# Altium PCB PCB1_Bhavik.PcbDoc
Units mm, origin at the board's own origin, x right, y up, seen from the top; angles counter-clockwise.
Board outline 50 x 50 mm, 2 copper layers (Top Layer, Bottom Layer); 221 components, 144 nets, 620 pads, 0 vias.
Unrouted connection lines stored in the file: 399.
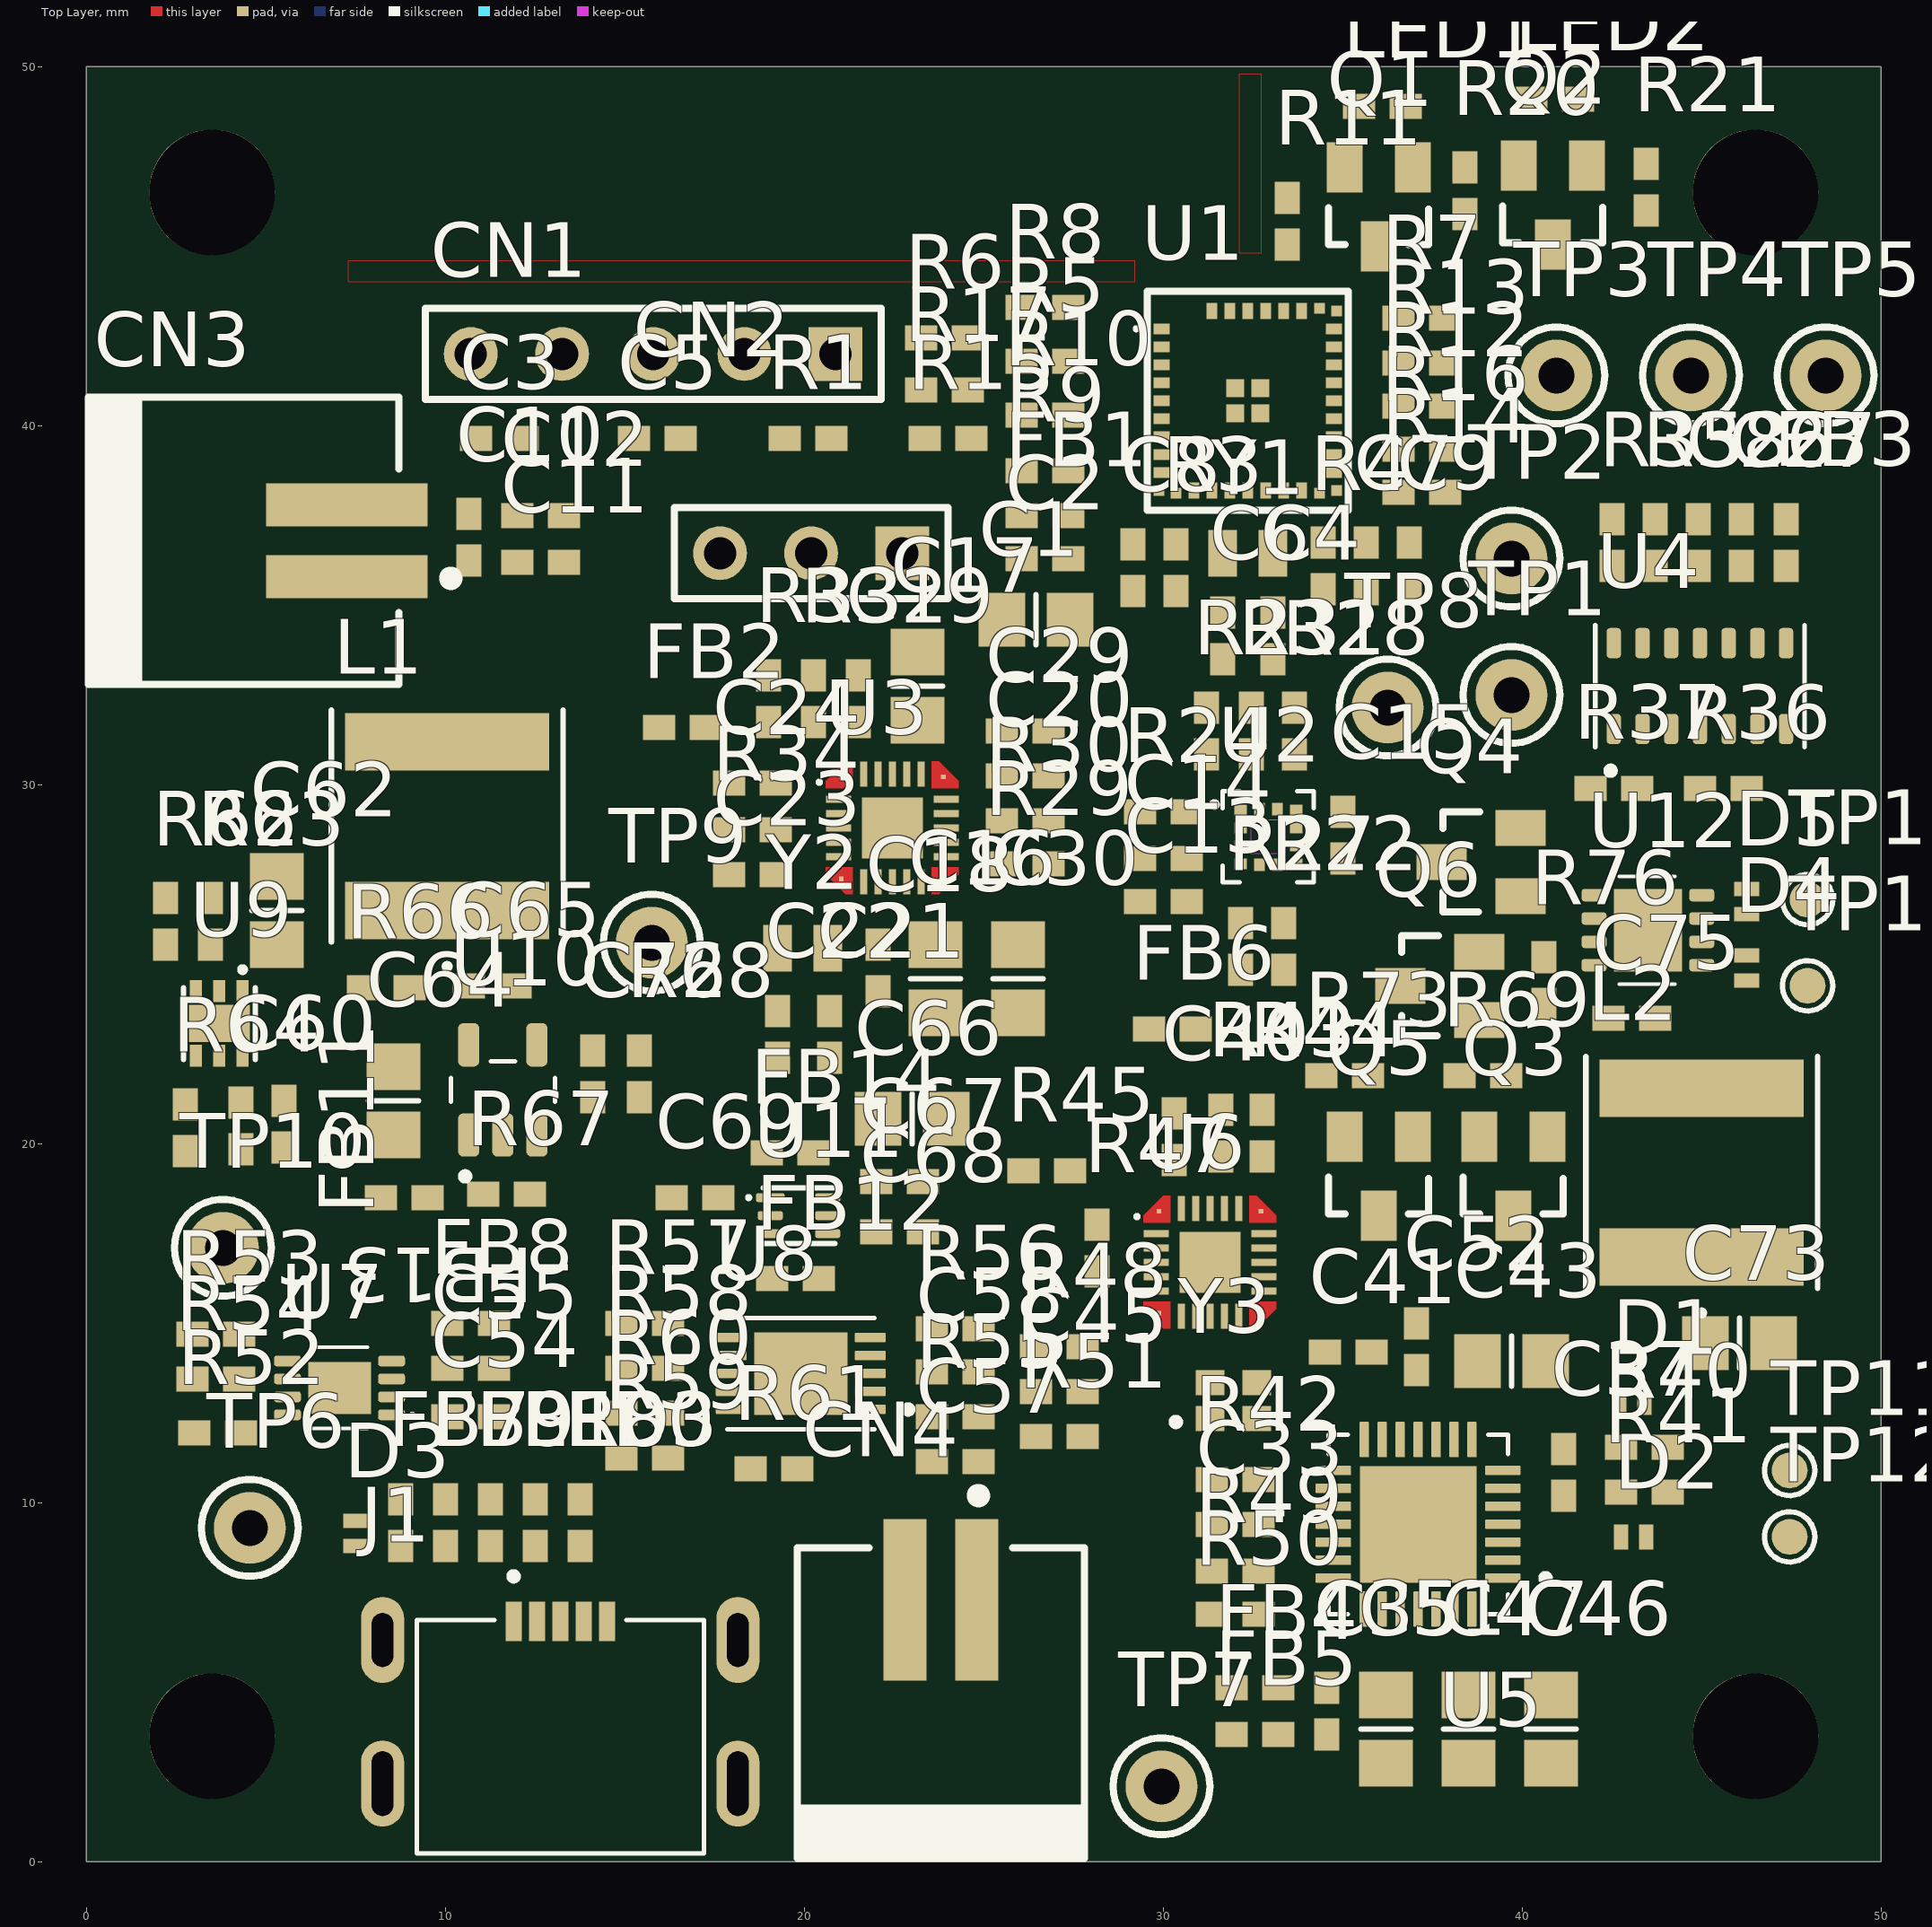
[diagram p0: Top Layer view]
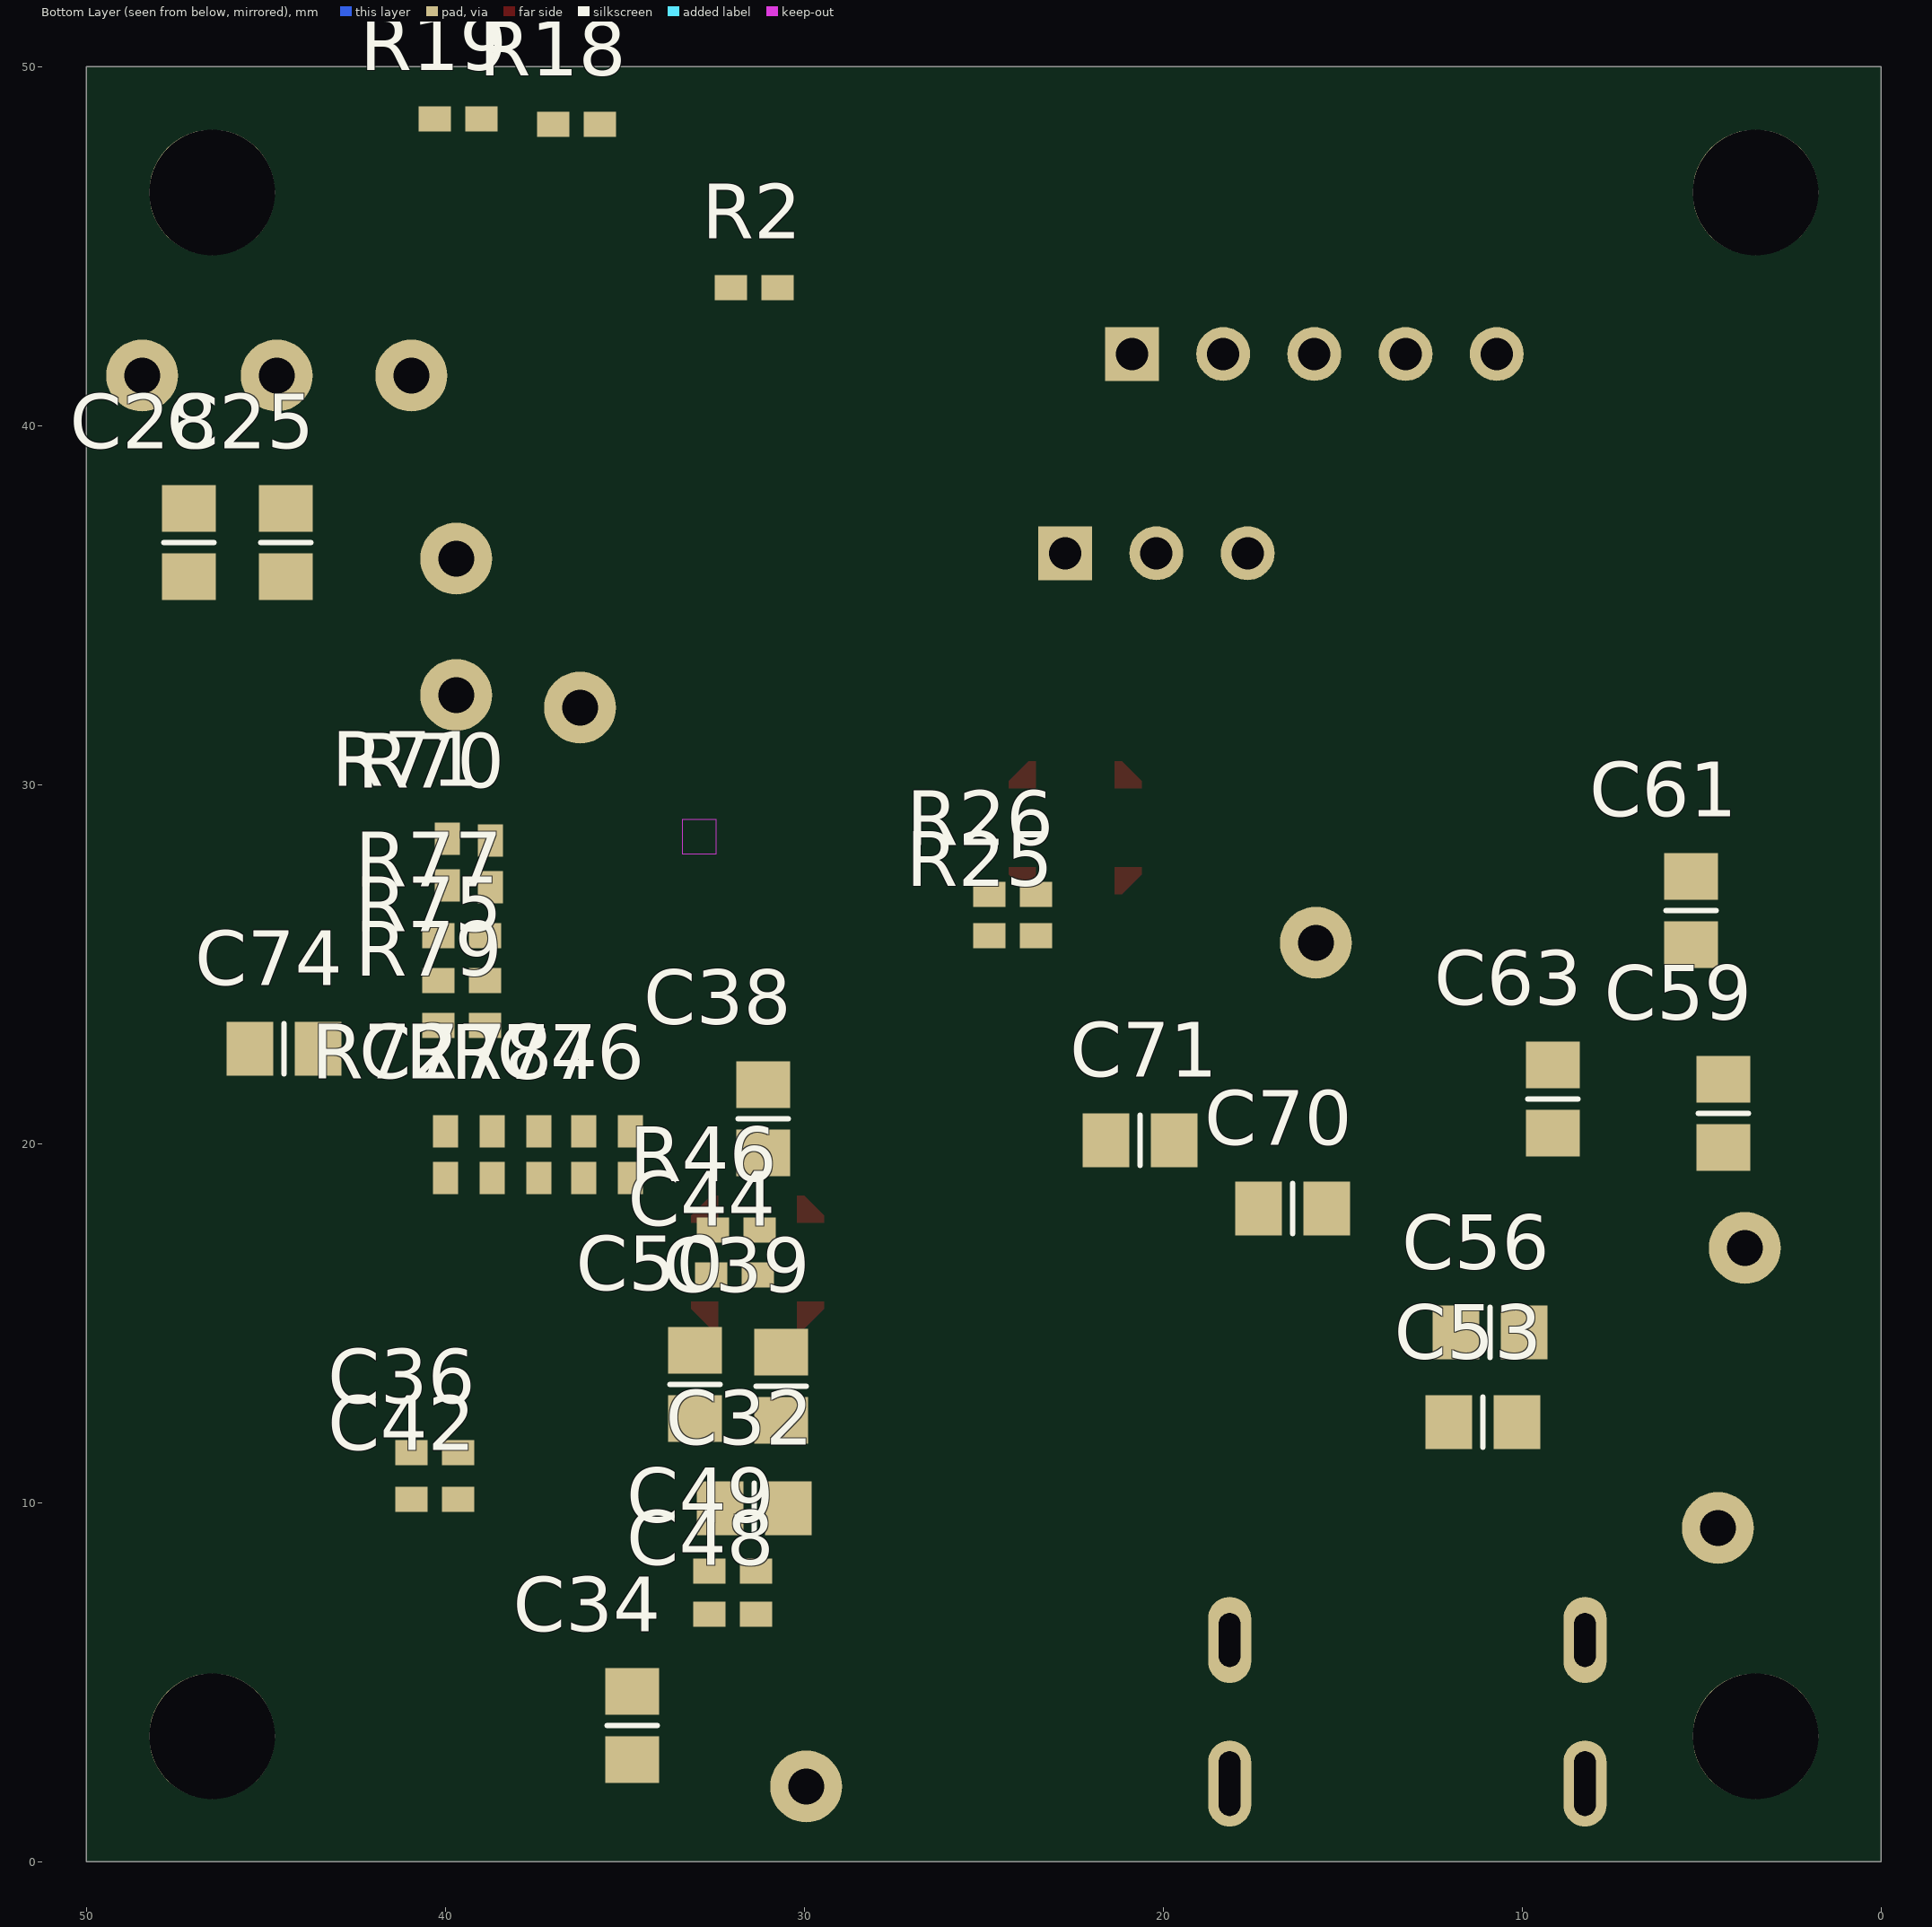
[diagram p1: Bottom Layer view, seen from below]

## Layer stack, top to bottom
Top Solder: solder mask 0.0102, Solder Resist, Dk 3.5
Top Layer: signal copper 0.0356
Dielectric 1: dielectric 0.32, FR-4, Dk 4.8
Bottom Layer: signal copper 0.0356
Bottom Solder: solder mask 0.0102, Solder Resist, Dk 3.5

## Board outline
0,0 50,0 50,50 0,50

## Design rules (kind name [scope] priority, off if disabled: settings)
Clearance [All] p1: gap=0.2 ignorepadtopadclearanceinfootprint=FALSE
PolygonConnect [All] p1: connectstyle=Relief reliefconductorwidth=0.254 reliefentries=4 polygonreliefangle="90 Angle" airgapwidth=0.254
RoutingVias [All] p1: holewidth=0.711 width=1.27 viastyle="Through Hole" minholewidth=0.711 minwidth=1.27 maxholewidth=0.711 maxwidth=1.27
SolderMaskExpansion [All] p1: expansion=0.102 istentingtop=FALSE
Width [All] p1: maxlimit=0.254 minlimit=0.254 preferedwidth=0.254
30 further rules are at their usual default settings.

## Components (designator, comment, footprint, x,y, rotation, side; value= is the part's Value field where it differs from the comment)
C1 "10uF" 0805C 26.45,34.6 r0 top
C2 "0.1uF" 0402C 26.7,36.3 r0 top
C3 "0.1uF" 0402C 11.5,39.65 r0 top
C4 "DNP" 0402C 33.05,34.15 r270 top
C5 "0.1uF" 0402C 15.9,39.65 r0 top
C6 "DNP" 0402C 31.65,34.15 r270 top
C7 "0.1uF" 0402C 35.65,36.1 r90 top
C8 "0.1uF" 0402C 29.15,36.05 r90 top
C9 "0.1uF" 0402C 36.85,36.1 r90 top
C10 "DNP" 0402C 10.65,36.9 r90 top
C11 "DNP" 0402C 12.65,36.2 r180 top
C12 "DNP" 0402C 12.65,37.5 r180 top
C13 "0.1uF" 0402C 30,26.75 r0 top
C14 "0.1uF" 0402C 30,27.95 r0 top
C15 "0.1uF" 0402C 35,28.6 r270 top
C16 "10uF" 0805C 23.65,24.6 r90 top
C17 "1uF" 0805C 23.15,32.75 r270 top
C18 "0.1uF" 0402C 22.05,24.9 r90 top
C19 "0.1uF" 0402C 21.5,32.4 r270 top
C20 "0.1uF" 0402C 26.15,30.25 r180 top
C21 "DNP" 0402C 20.7,23.05 r90 top
C22 "DNP" 0402C 19.25,23.05 r90 top
C23 "0.1uF" 0402C 18.55,27.5 r0 top
C24 "0.1uF" 0402C 18.55,30.05 r0 top
C25 "4.7uF" 0805C 44.45,36.75 r270 bottom
C26 "0.1uF" 0402C 44.9,36.75 r270 top
C27 "0.1uF" 0402C 46.1,36.75 r270 top
C28 "10uF" 0805C 47.15,36.75 r270 bottom
C29 "0.1uF" 0402C 26.15,31.5 r180 top
C30 "1uF" 0805C 25.95,24.6 r90 top
C31 "0.1uF" 0402C 351.417,-10.913 r90 top
C32 "10uF" 0805C 31.4,9.85 r0 bottom
C33 "0.1uF" 0402C 32,9.4 r0 top
C34 "10uF" 0805C 34.8,3.8 r90 bottom
C35 "0.1uF" 0402C 34.55,4.2 r90 top
C36 "10pF" 0402C 40.3,11.4 r180 bottom
C37 "1nF" 0402C 41.15,10.85 r90 top
C38 "10uF" 0805C 31.15,20.7 r270 bottom
C39 "1uF" 0805C 30.65,13.25 r90 bottom
C40 "0.1uF" 0402C 30.3,20.2 r270 top
C41 "0.1uF" 0402C 35.15,14.2 r180 top
C42 "10pF" 0402C 40.3,10.1 r180 bottom
C43 "1uF" 0805C 39.7,13.95 r0 top
C44 "1nF" 0402C 31.95,16.35 r0 bottom
C45 "0.1uF" 0402C 27.1,13.1 r0 top
C46 "1uF" 0805C 40.8,3.7 r90 top
C47 "10uF" 0805C 38.5,3.7 r90 top
C48 "100pF" 0402C 32,6.9 r180 bottom
C49 "100pF" 0402C 32,8.1 r180 bottom
C50 "1uF" 0805C 33.05,13.3 r90 bottom
C51 "10uF" 0805C 36.2,3.7 r90 top
C52 "1nF" 0402C 37.05,14.35 r270 top
C53 "4.7uF" 0805C 11.1,12.25 r180 bottom
C54 "0.1uF" 0402C 10.7,12.4 r180 top
C55 "0.1uF" 0402C 10.7,13.75 r180 top
C56 "4.7uF" 0805C 10.9,14.75 r180 bottom
C57 "0.1uF" 0402C 24.2,11.15 r0 top
C58 "0.1uF" 0402C 24.2,13.65 r180 top
C59 "1uF" 0805C 4.4,20.85 r90 bottom
C60 "0.1uF" 0402C 4.3,20.5 r90 top
C61 "1uF" 0805C 5.3,26.5 r270 bottom
C62 "4.7uF" 0805C 5.3,26.5 r270 top
C63 "4.7uF" 0805C 9.15,21.25 r270 bottom
C64 "1uF" 0805C 8.55,21.2 r270 top
C65 "DNP" 0402C 11.3,24.4 r0 top
C66 "4.7uF" 0805C 23,20.7 r180 top
C67 "0.1uF" 0402C 22.65,18.95 r180 top
C68 "0.1uF" 0402C 22.65,17.55 r180 top
C69 "0.1uF" 0402C 16.95,18.5 r0 top
C70 "4.7uF" 0805C 16.4,18.2 r0 bottom
C71 "4.7uF" 0805C 20.65,20.1 r180 bottom
C72 "22pF" 0402C 14.1,21.95 r90 top
C73 "10uF" 0805C 46.05,14.45 r180 top
C74 "10uF" 0805C 44.5,22.65 r0 bottom
C75 "0.1uF" 0402C 43.05,23.5 r180 top
C76 "0.1uF" 0402C 34.85,19.7 r270 bottom
C77 "0.1uF" 0402C 38.7,19.7 r270 bottom
CN1 "Header 5" HDR1X5 15.79,42 r180 top
CN2 "Header 3" HDR1X3 20.19,36.45 r180 top
CN3 "CON_2P_140-502-417-060" 140-502-417-060 7.25,36.8 r270 top
CN4 "CON_2P_140-502-417-060" 140-502-417-060 23.8,7.3 r0 top
D1 "D5V0P1B2LP-7B" D5V0P1B2LP-7B 43.05,12.8 r180 top
D2 "D5V0P1B2LP-7B" D5V0P1B2LP-7B 43.1,9.05 r180 top
D3 "D5V0P1B2LP-7B" D5V0P1B2LP-7B 7.5,9.15 r90 top
D4 "D5V0P1B2LP-7B" D5V0P1B2LP-7B 46.25,24.9 r270 top
D5 "D5V0P1B2LP-7B" D5V0P1B2LP-7B 46.25,26.75 r270 top
FB1 "Ferrite Bead" 0402R 26.7,37.5 r180 top
FB2 "Ferrite Bead" 0402R 16.6,31.6 r0 top
FB3 "Ferrite Bead" 0402R 47.35,36.75 r90 top
FB4 "Ferrite Bead" 0402R 32.55,4.85 r180 top
FB5 "Ferrite Bead" 0402R 32.55,3.55 r0 top
FB6 "Ferrite Bead" 0402R 30.25,23.2 r180 top
FB7 "Ferrite Bead" 0402R 8.75,9.45 r90 top
FB8 "Ferrite Bead" 0402R 10.7,15 r0 top
FB9 "Ferrite Bead" 0402R 10,9.45 r90 top
FB10 "Ferrite Bead" 0402R 11.25,9.45 r90 top
FB11 "Ferrite Bead" 0402R 5.5,20.55 r90 top
FB12 "Ferrite Bead" 0402R 19.75,16.25 r180 top
FB13 "Ferrite Bead" 0402R 8.85,18.5 r180 top
FB14 "Ferrite Bead" 0402R 19.6,19.75 r0 top
J1 "0476420001" MOLEX_476420001 13.2,6.7 r0 top
L1 "470uH" NR6028T3R0N 10.05,28.85 r90 top
L2 "10uH" NR6028T3R0N 45,19.2 r90 top
LED1 "5988A10107F" 0402R 36.1,48.9 r0 top value=Red
LED2 "5988A10107F" 0402R 40.9,49.1 r0 top value=Red
LED3 "LED_Green" 0402R 12.5,9.45 r90 top value=Green
Q1 "FDV301N" SOT_23 36,46.1 r180 top
Q2 "FDV301N" SOT_23 40.85,46.15 r180 top
Q3 "FDV301N" SOT_23 39.75,19.1 r180 top
Q4 "FDV301N" SOT_23 38.85,27.85 r90 top
Q5 "FDV301N" SOT_23 36,19.1 r180 top
Q6 "FDV301N" SOT_23 37.7,24.4 r90 top
R1 "1K" 0402R 20.1,39.65 r0 top
R2 "0E" 0402R 31.4,43.85 r180 bottom
R3 "4.7k" 0402R 30.35,36.05 r270 top
R4 "4.7k" 0402R 34.45,36.1 r270 top
R5 "0E" 0402R 26.7,41.8 r180 top
R6 "0E" 0402R 23.9,42.45 r180 top
R7 "0E" 0402R 37.2,43 r0 top
R8 "0E" 0402R 26.7,43.3 r180 top
R9 "4.7k" 0402R 26.7,38.75 r180 top
R10 "4.7k" 0402R 26.7,40.3 r180 top
R11 "0E" 0402R 33.45,45.7 r90 top
R12 "0E" 0402R 37.2,40.55 r180 top
R13 "0E" 0402R 37.2,41.75 r0 top
R14 "0E" 0402R 37.2,38.15 r0 top
R15 "0E" 0402R 24,39.65 r0 top
R16 "0E" 0402R 37.2,39.35 r0 top
R17 "0E" 0402R 23.9,41 r0 top
R18 "100E" 0402R 36.35,48.4 r180 bottom
R19 "100E" 0402R 39.65,48.55 r0 bottom
R20 "1K" 0402R 38.4,46.55 r90 top
R21 "1K" 0402R 43.45,46.65 r90 top
R22 "0E" 0402R 33.35,25.5 r270 top
R23 "DNP" 0402C 31.2,31.5 r90 top
R24 "DNP" 0402C 30,29.25 r180 top
R25 "1.2K" 0402R 24.2,25.8 r0 bottom
R26 "1.2K" 0402R 24.2,26.95 r0 bottom
R27 "0E" 0402R 32.15,25.5 r270 top
R28 "DNP" 0402C 33.65,31.5 r90 top
R29 "0E" 0402R 26.15,27.8 r0 top
R30 "0E" 0402R 26.15,29 r0 top
R31 "0E" 0402R 32.45,31.5 r270 top
R32 "0E" 0402R 20.25,32.4 r270 top
R33 "0E" 0402R 19,32.4 r270 top
R34 "10E" 0402R 18.55,28.75 r180 top
R35 "1.2K" 0402R 42.5,36.75 r270 top
R36 "0E" 0402R 45.6,29.9 r180 top
R37 "0E" 0402R 42.55,29.9 r0 top
R38 "0E" 0402R 43.7,36.75 r270 top
R39 "0E" 0402R 345.575,-10.913 r90 top
R40 "49.9k" 0402R 43.4,11.55 r0 top
R41 "49.9k" 0402R 43.4,10.3 r0 top
R42 "0E" 0402R 32,10.65 r0 top
R43 "0E" 0402R 31.6,20.3 r90 top
R44 "0E" 0402R 32.75,20.3 r90 top
R45 "0E" 0402R 26.75,19.25 r0 top
R46 "100E" 0402R 31.9,17.6 r180 bottom
R47 "0E" 0402R 28.15,17.1 r90 top
R48 "0E" 0402R 27.1,14.35 r0 top
R49 "100E" 0402R 32,8.1 r0 top
R50 "100E" 0402R 32,6.9 r0 top
R51 "10E" 0402R 27.1,11.85 r180 top
R52 "49.9k" 0402R 3.65,11.95 r0 top
R53 "49.9k" 0402R 3.6,14.7 r0 top
R54 "0E" 0402R 3.6,13.45 r0 top
R55 "1K" 0402R 24.2,12.4 r0 top
R56 "470E" 0402R 24.2,14.85 r0 top
R57 "0E" 0402R 15.55,15 r180 top
R58 "0E" 0402R 15.55,13.75 r180 top
R59 "0E" 0402R 15.55,11.25 r180 top
R60 "0E" 0402R 15.55,12.5 r180 top
R61 "1E" 0402R 19.15,10.95 r180 top
R62 "560k" 0402R 2.2,26.2 r90 top
R63 "100k" 0402R 3.45,26.2 r270 top
R64 "49.9k" 0402R 2.75,20.45 r90 top
R65 "0E" 0402R 54.05,3.5 r90 top
R66 "560k" 0402R 8.35,24.35 r0 top
R67 "0E" 0402R 11.7,18.6 r180 top
R68 "180k" 0402R 15.4,21.95 r90 top
R69 "4.7k" 0402R 38.9,21.9 r0 top
R70 "10k" 0402R 38.75,27.8 r270 bottom
R71 "10k" 0402R 39.95,27.85 r90 bottom
R72 "1K" 0402R 40,19.7 r270 bottom
R73 "4.7k" 0402R 35.05,21.9 r0 top
R74 "1K" 0402R 36.15,19.7 r270 bottom
R75 "10k" 0402R 39.55,24.55 r180 bottom
R76 "10k" 0402R 40.6,24.55 r270 top
R77 "100k" 0402R 39.55,25.8 r0 bottom
R78 "100k" 0402R 37.4,19.7 r270 bottom
R79 "0E" 0402R 39.55,23.3 r0 bottom
R80 "3k" 0402R 13.75,9.45 r90 top
TP1 "Test_Point" TP 39.7,32.5 r90 top
TP2 "Test_Point" TP 39.7,36.3 r90 top
TP3 "Test_Point" TP 40.95,41.4 r90 top
TP4 "Test_Point" TP 44.7,41.4 r90 top
TP5 "Test_Point" TP 48.45,41.4 r90 top
TP6 "Test_Point" TP 4.55,9.3 r0 top
TP7 "Test_Point" TP 29.95,2.1 r0 top
TP8 "Test_Point" TP 36.25,32.15 r0 top
TP9 "Test_Point" TP 15.75,25.6 r0 top
TP10 "Test_Point" TP 3.8,17.1 r90 top
TP11 "Test_Point" TP_SMD 47.45,10.9 r90 top
TP12 "Test_Point" TP_SMD 47.45,9.05 r90 top
TP13 "Test_Point" TP_SMD 47.95,24.4 r90 top
TP14 "Test_Point" TP_SMD 47.95,26.8 r90 top
U1 "HJ-380IMH" HJ-380IMH 32.35,40.7 r270 top
U2 "BMA400" BMA400 32.925,28.55 r0 top
U3 "MAX32664GTGD+T" MAX32664GTGA+T 22.45,28.8 r0 top
U4 "MAX30102EFD+T" MAX30101EFD+T 44.95,32.75 r90 top value="14 OESIP"
U5 "MAX30003CTI+" MAX30003CTI+ 37.1,9.4 r180 top
U6 "MAX32663AGTGFS+" MAX32663AGTGFS+ 31.3,16.7 r0 top
U7 "Battery Charger_MCP73832" MCP73832-3ACI/MC 7.05,13.2 r180 top
U8 "DS2782G+" DS2782G+ 19.9,13.6 r180 top
U9 "ADP123ACPZ-R7" ADP123ACPZ-R7 3.7,23.35 r270 top
U10 "LM3670MFX-ADJ/NOPB" LM3670MFX-ADJ/NOPB 11.6,21.5 r90 top
U11 "TPS7A1018PDSET" TPS7A1018PDSET 19.85,18 r0 top
U12 "BMD101" BMD101 43.5,25.95 r180 top
Y1 "ECS-.327-6-12R-TR" ECS-.327-6-12R-TR 32.35,36.45 r0 top value=32.768kHz
Y2 "ECS-.327-6-12R-TR" ECS-.327-6-12R-TR 19.95,25.45 r0 top value=32.768kHz
Y3 "ECS-327MVATX-1-CN-TR" ECS-327MVATX-1-CN-TR 31.95,12.85 r0 top

## Footprints (in the part's own frame and the unit in brackets; to place one, negate y for a bottom-side part, rotate by r counter-clockwise, add the part's x,y. Pads: shape width x height; smd on the part's side, far side on the other; paste and mask are expansions set on the pad)
140-502-417-060 [mm]
  rect 1.2x4.5 smd: 1(1,0) 2(-1,0)
  silkscreen extent -4,-7.2 4,2.98, body extent -4,-7.2 4,1.45, height 5.63
0402C [mm]
  rect 0.9x0.7 smd: 1(-0.65,0) 2(0.65,0)
  body extent -0.56,-0.28 0.56,0.28, height 0.41
0402R [mm]
  rect 0.9x0.7 smd: 1(-0.65,0) 2(0.65,0)
  body extent -0.56,-0.28 0.56,0.28, height 0.41
0805C [mm]
  rect 1.3x1.5 smd: 1(-0.95,0) 2(0.95,0)
  silkscreen extent 0,-0.7 0,0.7
ADP123ACPZ-R7 [mm]
  rect 0.606x0.331 smd paste+0 mask+0.03: 1(-0.9,0.65) 2(-0.9,0) 3(-0.9,-0.65) 4(0.9,-0.65) 5(0.9,0) 6(0.9,0.65)
  rect 1.041x1.702 smd paste+0 mask+0.03: 7(0,0)
  silkscreen extent -1.55,-1 1,1, body extent -1,-0.98 1.01,0.98, height 0.6
BMA400 [mm]
  rect 0.35x0.3 smd paste+0 mask+0.05: 1(-0.775,0.75) 2(-0.775,0.25) 3(-0.775,-0.25) 4(-0.775,-0.75) 7(0.775,-0.75) 8(0.775,-0.25) 9(0.775,0.25) 10(0.775,0.75)
  rect 0.3x0.35 smd paste+0 mask+0.05: 5(-0.25,-0.775) 6(0.25,-0.775) 11(0.25,0.775) 12(-0.25,0.775)
  Keep-Out Layer region: 0.475,-0.475 -0.475,-0.475 -0.475,0.475 0.475,0.475
  Keep-Out Layer region: 0.475,-0.475 -0.475,-0.475 -0.475,0.475 0.475,0.475
  silkscreen extent -1.57,-1.27 1.27,1.27, body extent -0.99,-1.01 1.01,0.99, height 1
BMD101 [mm]
  rrect50% 0.7x0.35 smd paste+0 mask+0.05: 1(-1.5,0.975) 2(-1.5,0.325) 3(-1.5,-0.325) 4(-1.5,-0.975) 5(1.5,-0.975) 6(1.5,-0.325) 7(1.5,0.325) 8(1.5,0.975)
  rect 1.9x2.3 smd paste+0 mask+0.05: 9(0,0)
  silkscreen extent -2.08,-1.5 0.8,1.5
D5V0P1B2LP-7B [mm]
  rect 0.4x0.7 smd: 1(-0.35,0) 2(0.35,0)
DS2782G+ [mm]
  rrect25% 0.86x0.27 smd: 1(-1.935,1) 2(-1.935,0.5) 3(-1.935,0) 4(-1.935,-0.5) 5(-1.935,-1) 6(1.935,-1) 7(1.935,-0.5) 8(1.935,0) 9(1.935,0.5) 10(1.935,1)
  rect 2.6x2.3 smd paste-2: 11(0,0)
  silkscreen extent -3.1,-1.55 2.05,1.55, body extent -2,-1.5 2,1.5, height 0.8
ECS-327MVATX-1-CN-TR [mm]
  rect 0.8x0.7 smd: 1(-0.65,-0.5) 2(0.65,-0.5) 3(0.65,0.5) 4(-0.65,0.5)
  silkscreen extent -1.7,-0.7 -1.5,-0.5, body extent -1.06,-0.85 1.06,0.85, height 0.89
ECS-.327-6-12R-TR [mm]
  rect 0.8x1.3 smd: 1(-0.7,0) 2(0.7,0)
HDR1X3 [mm] "Connector; Header; 5 Position"
  rect 1.5x1.5 hole 0.9: 1(-2.54,0)
  round 1.5 hole 0.9: 2(0,0) 3(2.54,0)
  silkscreen extent -3.81,-1.27 3.81,1.27
HDR1X5 [mm] "Connector; Header; 5 Position"
  rect 1.5x1.5 hole 0.9: 1(-5.08,0)
  round 1.5 hole 0.9: 2(-2.54,0) 3(0,0) 4(2.54,0) 5(5.08,0)
  silkscreen extent -6.35,-1.27 6.35,1.27
HJ-380IMH [mm]
  rect 0.3x0.45 smd paste+0 mask+0.05: 1(-2,-2.4) 2(-1.5,-2.4) 3(-1,-2.4) 4(-0.5,-2.4) 5(0,-2.4) 6(0.5,-2.4) 7(1,-2.4) 8(1.5,-2.4) 9(2,-2.4) 21(2,2.4) 22(1.5,2.4) 23(1,2.4) 24(0.5,2.4) 25(0,2.4) 26(-0.5,2.4) 27(-1,2.4) 28(-1.5,2.4) 29(-2,2.4)
  rect 0.3x0.3 smd paste+0 mask+0.05: 10(2.5,-2.475) 11(2.575,-2) 19(2.575,2) 20(2.5,2.475) 30(-2.5,2.475) 31(-2.575,2)
  rect 0.45x0.3 smd paste+0 mask+0.05: 12(2.5,-1.5) 13(2.5,-1) 14(2.5,-0.5) 15(2.5,0) 16(2.5,0.5) 17(2.5,1) 18(2.5,1.5) 32(-2.5,1.5) 33(-2.5,1) 34(-2.5,0.5) 35(-2.5,0) 36(-2.5,-0.5) 37(-2.5,-1)
  rect 0.5x0.5 smd paste+0 mask+0.05: 38(-0.35,0.35) 38(-0.35,-0.35) 38(0.35,0.35) 38(0.35,-0.35)
  silkscreen extent -3.05,-3.15 3.05,2.8
LM3670MFX-ADJ/NOPB [mm]
  rrect50% 1.21x0.59 smd: 1(-1.255,0.95) 2(-1.255,0) 3(-1.255,-0.95) 4(1.255,-0.95) 5(1.255,0.95)
  silkscreen extent -2.51,-1.45 0.8,1.45, body extent -1.4,-1.45 1.4,1.45, height 1.45
MAX30003CTI+ [mm]
  rrect25% 0.99x0.27 smd: 1(-2.36,1.5) 2(-2.36,1) 3(-2.36,0.5) 4(-2.36,0) 5(-2.36,-0.5) 6(-2.36,-1) 7(-2.36,-1.5) 15(2.36,-1.5) 16(2.36,-1) 17(2.36,-0.5) 18(2.36,0) 19(2.36,0.5) 20(2.36,1) 21(2.36,1.5)
  rrect25% 0.27x0.99 smd: 8(-1.5,-2.36) 9(-1,-2.36) 10(-0.5,-2.36) 11(0,-2.36) 12(0.5,-2.36) 13(1,-2.36) 14(1.5,-2.36) 22(1.5,2.36) 23(1,2.36) 24(0.5,2.36) 25(0,2.36) 26(-0.5,2.36) 27(-1,2.36) 28(-1.5,2.36)
  rect 3.25x3.25 smd paste-3: 29(0,0)
  silkscreen extent -3.65,-2.5 2.5,2.5, body extent -2.5,-2.5 2.5,2.5, height 0.8
MAX30101EFD+T [mm]
  rrect50% 0.84x0.4 smd: 1(-1.195,2.4) 2(-1.195,1.6) 3(-1.195,0.8) 4(-1.195,0) 5(-1.195,-0.8) 6(-1.195,-1.6) 7(-1.195,-2.4) 8(1.195,-2.4) 9(1.195,-1.6) 10(1.195,-0.8) 11(1.195,0) 12(1.195,0.8) 13(1.195,1.6) 14(1.195,2.4)
  silkscreen extent -2.46,-2.91 1.7,2.91, body extent -1.65,-2.8 1.65,2.8, height 1.65
MAX32663AGTGFS+ [mm]
  rect 0.127x0.127 smd: 1(-1.422,1.422) 7(-1.422,-1.422) 13(1.422,-1.422) 19(1.422,1.422)
  rect 0.7x0.2 smd paste+0 mask+0: 2(-1.5,0.8) 3(-1.5,0.4) 4(-1.5,0) 5(-1.5,-0.4) 6(-1.5,-0.8) 14(1.5,-0.8) 15(1.5,-0.4) 16(1.5,0) 17(1.5,0.4) 18(1.5,0.8)
  rect 0.2x0.7 smd paste+0 mask+0: 8(-0.8,-1.5) 9(-0.4,-1.5) 10(0,-1.5) 11(0.4,-1.5) 12(0.8,-1.5) 20(0.8,1.5) 21(0.4,1.5) 22(0,1.5) 23(-0.4,1.5) 24(-0.8,1.5)
  rect 1.702x1.702 smd paste+0 mask+0: 25(0,0)
  Top Layer region: 1.1,1.1 1.85,1.1 1.85,1.3 1.3,1.85 1.1,1.85
  Top Layer region: -1.1,1.1 -1.1,1.85 -1.3,1.85 -1.85,1.3 -1.85,1.1
  Top Layer region: 1.1,-1.1 1.1,-1.85 1.3,-1.85 1.85,-1.3 1.85,-1.1
  Top Layer region: -1.1,-1.1 -1.85,-1.1 -1.85,-1.3 -1.3,-1.85 -1.1,-1.85
  silkscreen extent -2.08,1.22 -1.98,1.32, body extent -1.55,-1.55 1.55,1.55, height 0.8
MAX32664GTGA+T [mm]
  rect 0.127x0.127 smd: 1(-1.422,1.422) 7(-1.422,-1.422) 13(1.422,-1.422) 19(1.422,1.422)
  rect 0.7x0.2 smd paste+0 mask+0: 2(-1.5,0.8) 3(-1.5,0.4) 4(-1.5,0) 5(-1.5,-0.4) 6(-1.5,-0.8) 14(1.5,-0.8) 15(1.5,-0.4) 16(1.5,0) 17(1.5,0.4) 18(1.5,0.8)
  rect 0.2x0.7 smd paste+0 mask+0: 8(-0.8,-1.5) 9(-0.4,-1.5) 10(0,-1.5) 11(0.4,-1.5) 12(0.8,-1.5) 20(0.8,1.5) 21(0.4,1.5) 22(0,1.5) 23(-0.4,1.5) 24(-0.8,1.5)
  rect 1.702x1.702 smd paste+0 mask+0: 25(0,0)
  Top Layer region: 1.1,1.1 1.85,1.1 1.85,1.3 1.3,1.85 1.1,1.85
  Top Layer region: -1.1,1.1 -1.1,1.85 -1.3,1.85 -1.85,1.3 -1.85,1.1
  Top Layer region: 1.1,-1.1 1.1,-1.85 1.3,-1.85 1.85,-1.3 1.85,-1.1
  Top Layer region: -1.1,-1.1 -1.85,-1.1 -1.85,-1.3 -1.3,-1.85 -1.1,-1.85
  silkscreen extent -2.08,1.22 -1.98,1.32, body extent -1.55,-1.55 1.55,1.55, height 0.8
MCP73832-3ACI/MC [mm]
  rrect50% 0.75x0.3 smd paste+0 mask+0.05: 1(-1.45,0.75) 2(-1.45,0.25) 3(-1.45,-0.25) 4(-1.45,-0.75) 5(1.45,-0.75) 6(1.45,-0.25) 7(1.45,0.25) 8(1.45,0.75)
  rect 1.75x1.45 smd paste+0 mask+0.05: 9(0,0)
  silkscreen extent -2.08,-1.13 0.77,1.13, body extent -1.5,-1 1.5,1, height 0.94
MOLEX_476420001 [mm]
  rect 0.45x1.1 smd: 1(-1.3,0) 2(-0.65,0) 3(0,0) 4(0.65,0) 5(1.3,0)
  oval 1.2x2.4 hole 0.6 slot 1.5 at 90 deg: 6(-4.95,-0.52) 9(4.95,-0.52)
  oval 1.2x2.4 hole 0.6 slot 1.8 at 90 deg: 7(-4.95,-4.52) 8(4.95,-4.52)
  silkscreen extent -4,-6.47 4,1.35, body extent -5.1,-6.83 5.1,0.4, height 1.81
NR6028T3R0N [mil]
  rect 63x224 smd paste+0: 1(-92.5,0) 2(92.5,0)
  silkscreen extent -157,-127 127,127, body extent -122,-122 122,122, height 110
SOT_23 [mm]
  rect 1x1.4 smd: 1(-0.95,-1.1) 2(0.95,-1.1) 3(0,1.1)
  silkscreen extent -1.4,0.03 1.4,1.06, body extent -1.45,-1.15 1.45,1.15, height 1.1
TP [mm]
  round 2 hole 1: 1(0,0)
  silkscreen extent -1.35,-1.35 1.35,1.35
TP_SMD [mm]
  round 1 smd: 1(0,0)
  silkscreen extent -0.7,-0.7 0.7,0.7
TPS7A1018PDSET [mm]
  rrect50% 0.8x0.25 smd paste+0 mask+0.03: 1(-0.8,0.5)
  rrect50% 0.7x0.25 smd paste+0 mask+0.03: 2(-0.8,0) 3(-0.8,-0.5) 4(0.8,-0.5) 5(0.8,0) 6(0.8,0.5)
  silkscreen extent -1.45,-0.77 1,0.77

## Part data
C1 C16 C28 C32 C34 C38 C47 C51 C73 C74: library part CAP_0805_10uF_16V, "CAP CER 10UF 16V X7R 0805", Alternate MFR="Taiyo Yuden", Alternate MPN=EMK212BB7106MG-T, Package=0805
C2 C3 C5 C7 C8 C9 C13 C14 C15 C18 C19 C20 C23 C24 C26 C27 C29 C31 C33 C35 C40 C41 C45 C54 C55 C57 C58 C60 C67 C68 C69 C75 C76 C77: library part CAP_0402_0.1uF_50V, "CAP CER 0.1UF 50V X7R 0402", Alternate MFR="Samsung Electro-Mechanics", Alternate MPN=CL05B104KB54PNC, Package=0402
C4 C6 C10 C11 C12 C21 C22 C65: library part CAP_0402_DNP, "CAP CER DNP 0402", MFR=Generic, Package=0402, MPN=Generic
C17 C30 C39 C43 C46 C50 C59 C61 C64: library part CAP_0805_1uF_25V, "CAP CER 1UF 25V X7R 0805", Alternate MFR="Würth Elektronik", Alternate MPN=885012207078, Package=0805
C25 C53 C56 C62 C63 C66 C70 C71: library part CAP_0805_4.7uF_16V, "CAP CER MLCC 4.7uF X7R 16V  0805", Alternate MFR="Murata Electronics", Alternate MPN=GRM21BR71C475ME51K, Package=0805
C36 C42: library part CAP_0402_10pF_50V, "CAP CER 10PF 50V C0G/NP0 0402", Alternate MFR="Murata Electronics", Alternate MPN=GRT1555C1H100JA02J, Package=0402
C37 C44 C52: library part CAP_0402_1nF_50V, "CAP CER 1000PF 50V X7R 0402", Alternate MFR="TDK Corporation", Alternate MPN=C1005X7R1H102K050BA, Package=0402
C48 C49: library part CAP_0402_100pF_50V, "CAP CER 100PF 50V C0G 0402", Alternate MFR="TDK Corporation", Alternate MPN=C1005C0G1H101J050BA, Package=0402
C72: library part CAP_0402_22pF, "CAP CER 22PF 50V C0G 0402", Alternate MFR="TDK Corporation", Alternate MPN=C1005C0G1H220J050BA, MFR=Generic, Package=0402, MPN=Generic
CN1: library part CON_5P_CI0105M1HR0-NH, "5 POS 2.00MM(.079) SINGLE ROW SM", MFR="Cvilux USA", MPN=CI0105M1HR0-NH
CN2: library part CON_3P_CI0103M1HR0-NH, "3 POS 2.00MM(.079) SINGLE ROW SM", MFR="Cvilux USA", MPN=CI0103M1HR0-NH
CN3 CN4: "2.0MM PITCH CONNECTOR WITH 2 SUR", MFR="EDAC Inc.", MPN=140-502-417-060
D1 D2 D3 D4 D5: library part TVS_D5V0P1B2LP-7B, "TVS DIODE 5.5VWM 13VC DFN1006-2", MFR="Diodes Incorporated", Package=X1-DFN1006-2, MPN=D5V0P1B2LP-7B
FB1 FB2 FB3 FB4 FB5 FB6 FB7 FB8 FB9 FB10 FB11 FB12 FB13 FB14: "CHIP BEAD 600 OHM 0402 300mA", MFR=Walsin, MPN=WLBD1005K2U601TP, Package=0402
J1: library part Micro_USB_0476420001, "CONN RCPT MICRO USB B 5POS SMD", Alternate MFR=Molex, Alternate MPN=0476420001
L1: library part IND_470uH, "FIXED IND 470UH 105MA 14.3OHM SM", MFR=Bourns, MPN=SDR0302-471KL, Package=0302
L2: library part IND_10uH, "WE-PMI POWER MULTILAYER INDUCTOR", MFR="Würth Elektronik", MPN=74479777310A, Package=0805
LED1 LED2: library part LED_Red, "Red LED", Forward Voltage=1.6V, MFR=Dialight, Package=0402, MPN=5988A10107F
LED3: "Red LED", Alternate MFR=Lite-On, Alternate MPN=LTST-C281KGKT, Forward Voltage=2V, MFR=Kingbright, MPN=APG1005CGC-T, Package=0402
Q1 Q2 Q3 Q4 Q5 Q6: library part NMOS_FDV301N, "MOSFET N-CH 25V 220MA SOT23", MFR=onsemi, Package=SOT23, ComponentLink1Description="Manufacturer Link", ComponentLink1URL=http://www.irf.com/, MPN=FDV301N
R1 R20 R21 R55 R72 R74: library part RES_0402_1k, "RES SMD 1K OHM 1% 1/16W 0402", Alternate MFR=YAGEO, Alternate MPN=AC0402FR-071KL, MFR=Generic, Package=0402, MPN=Generic
R2 R5 R6 R7 R8 R11 R12 R13 R14 R15 R16 R17 R22 R27 R29 R30 R31 R32 R33 R36 R37 R38 R39 R42 R43 R44 R45 R47 R48 R54 R57 R58 R59 R60 R65 R67 R79: library part RES_0402_0E, "RES 0 OHM JUMPER 1/16W 0402", Alternate MFR=YAGEO, Alternate MPN=AC0402JR-130RL, MFR=Generic, Package=0402, MPN=Generic
R3 R4 R9 R10 R69 R73: library part RES_0402_4.7k, "RES 4.7K OHM 1% 1/16W 0402", Alternate MFR=YAGEO, Alternate MPN=RC0402FR-134K7L, MFR=Generic, Package=0402, MPN=Generic
R18 R19 R46 R49 R50: library part RES_0402_100E, "RES 100 OHM 1% 1/16W 0402", Alternate MFR=YAGEO, Alternate MPN=RC0402FR-13100RL, MFR=Generic, Package=0402, MPN=Generic
R23 R24 R28: library part RES_0402_DNP, "RES DNP 0402", Package=0402
R25 R26 R35: library part RES_0402_1.2k, "RES 1.2K OHM 1% 1/16W 0402", Alternate MFR=YAGEO, Alternate MPN=RC0402FR-071K2L, MFR=Generic, Package=0402, MPN=Generic
R34 R51: library part RES_0402_10E, "RES 10 OHM 1% 1/16W 0402", Alternate MFR=YAGEO, Alternate MPN=RC0402FR-1310RL, MFR=Generic, Package=0402, MPN=Generic
R40 R41 R52 R53 R64: library part RES_0402_49.9k, "RES 49.9K OHM 1% 1/16W 0402", Alternate MFR=YAGEO, Alternate MPN=RC0402FR-0749K9L, MFR=Generic, Package=0402, MPN=Generic
R56: library part RES_0402_470E, "RES 470 OHM 1% 1/16W 0402", Alternate MFR=YAGEO, Alternate MPN=RC0402FR-07470RL, MFR=Generic, Package=0402, MPN=Generic
R61: library part RES_0402_1E, "RES 1 OHM 1% 1/16W 0402", Alternate MFR=YAGEO, Alternate MPN=RC0402FR-071RL, MFR=Generic, Package=0402, MPN=Generic
R62 R66: library part RES_0402_560k, "RES 560K OHM 1% 1/16W 0402", Alternate MFR=YAGEO, Alternate MPN=RC0402FR-07560KL, MFR=Generic, Package=0402, MPN=Generic
R63 R77 R78: library part RES_0402_100k, "RES 100K OHM 1% 1/16W 0402", Alternate MFR=YAGEO, Alternate MPN=RC0402FR-07100KP, MFR=Generic, Package=0402, MPN=Generic
R68: library part RES_0402_180k, "RES 180K OHM 1% 1/16W 0402", Alternate MFR=YAGEO, Alternate MPN=RC0402FR-07180KL, MFR=Generic, Package=0402, MPN=Generic
R70 R71 R75 R76: library part RES_0402_10k, "RES SMD 10K OHM 1% 1/16W 0402", Alternate MFR=YAGEO, Alternate MPN=AF0402FR-0710KL, MFR=Generic, Package=0402, MPN=Generic
R80: library part RES_0402_3k, "RES SMD 3K OHM 0.1% 1/16W 0402", Alternate MFR=Panasonic, Alternate MPN=ERA-2ARB302X, MFR=Vishay, MPN=MCS04020D3001BE000, Package=0402
TP11 TP12 TP13 TP14: library part Test_Point_1
U1: library part "BLE Module_HJ-380IMH", "Chip-scale high performance ultra small (5.5mmX6mm) ultra low power / Bluetooth 5.0 module based on Nordic nRF52832", MFR="TangShan HongJia Electronic Technology Co., Ltd", MPN=HJ-380IMH
U2: library part AccSensor_BMA400, "ACCELEROMETER 2-16G 12LGA", MFR=Bosch, MPN=BMA400
U3: "Biometric Sensors CORTEX M4F 96MHZ ME11, TQFN 3X3", MFR="Maxim Integrated", Package="24-TQFN (3x3)", MPN=MAX32664GTGD+T
U4: library part MAX30101EFD+T, "Biometric Sensors Oximeter/Heart Rate Integrated Optical Sensor", MFR="Maxim Integrated", MPN=MAX30102EFD+T
U5: "Analog Front End - AFE Bio Potential AFE", MFR="Maxim Integrated", Package="28-TQFN (5X5)", MPN=MAX30003CTI+
U6: "SENSOR HUB W/ B-SECUR'S FULL HEA", MFR="Maxim Integrated", Package="24-TQFN (3x3)", MPN=MAX32663AGTGFS+
U7: "IC BATT CONTRL LI-ION 1CELL 8DFN", MFR=Microchip, MPN=MCP73832-3ACI/MC, Package="8-DFN (2x3)"
U8: "IC BATT MON LI-ION 1CELL 10TDFN", MFR="Maxim Integrated", Package="10-TDFN (3x4)", MPN=DS2782G+
U9: library part LDO_ADP123ACPZ-R7, "IC REG LIN POS ADJ 300MA 6LFCSP", MFR="Analog Devices", Package="6-LFCSP-UD (2x2)", MPN=ADP123ACPZ-R7
U10: library part Buck_LM3670MFX-ADJ/NOPB, "IC REG BUCK ADJ 350MA SOT23-5", MFR="Texas Instruments", Package=SOT-23-5, MPN=LM3670MFX-ADJ/NOPB
U11: library part LDO_TPS7A1018PDSET, "IC REG LINEAR 1.8V 300MA 6WSON", MFR=TI, Package="6-WSON (1.5x1.5)", MPN=TPS7A1018PDSET
U12: library part Bio-Signal_SoC_BMD101, "Mixed Signal SoC with Integrated AFE, DSP functions and UART", MFR=NeuroSky, MPN=BMD101
Y1 Y2: library part XTAL_32.768kHz, "CRYSTAL 32.7680KHZ 6PF SMD", Capacitance=6pF, MFR="ECS Inc.", MPN=ECS-.327-6-12R-TR
Y3: library part OSC_32.768kHz, "XTAL OSC XO 32.768KHZ SMD", MFR="ECS Inc.", Package="4-SMD, No Lead", MPN=ECS-327MVATX-1-CN-TR

## Free pads (board coordinates)
  round 3.5 hole 3.5: ""(3.5,3.5) ""(3.5,46.5) ""(46.5,3.5) ""(46.5,46.5)

## Nets (pads, with @x,y where several pads share a name; then routed paths per layer and width w, separated by ;. In a path a pad name is that pad's centre, name@x,y a point inside that pad or via, vN(x,y) a via of type N, cw(c..) or ccw(c..) an arc to the next point about the centre after c; other vN are vias at no path point)
ACCEL_INT: C29.2 R14.2 R27.2 U3.19
ACCEL_INT2: R16.2 R22.2
AGND: C34.1 C35.1 C36.2 C42.1 C46.1 C47.1 C51.1 C52.1 D1.1 D2.1 FB5.2 U5.1 U5.2 U5.3 U5.4 U5.5 U5.8 U5.24 U5.26 U5.28
BMD101_CS: C77.2 R11.2 R72.2 R78.2
BMD101_RST: C76.2 R13.2 R74.2 R77.2
DEBUG_LED_1: R20.1 U1.34
DEBUG_LED_2: R21.1 U1.33
DEBUG_RX: CN2.2 R7.2
DEBUG_TX: CN2.1 R6.2
FCLK_32.768kHz: U5.14 U6.9 Y3.3
GND: C1.1 C2.1 C3.2 C4.2 C5.2 C6.2 C7.1 C8.1 C9.1 C11.1 C12.1 C13.1 C14.1 C15.1 C16.1 C17.1 C18.1 C19.1 C20.1 C21.1 C22.1 C24.1 C25.1 C26.1 C29.1 C30.1 C31.1 C32.1 C33.1 C38.1 C39.1 C40.1 C41.1 C44.1 C48.1 C49.1 C50.1 C53.1 C54.1 C55.1 C56.1 C59.1 C60.1 C61.1 C62.1 C63.1 C64.1 C66.1 C67.1 C68.1 C69.1 C70.1 C71.1 C72.1 C73.1 C74.1 C75.1 C76.1 C77.1 CN1.5 CN2.3 D3.2 D4.2 D5.1 FB5.1 J1.5 Q1.3 Q2.3 Q3.3 Q5.3 R31.1 R34.1 R51.1 R52.1 R61.2 R63.1 R64.1 R65.1 R68.1 R77.1 R78.1 R80.1 U1.38 U2.8 U2.9 U3.7 U3.10 U3.25 U4.12 U5.12 U5.29 U6.7 U6.10 U6.25 U7.6 U7.9 U8.9 U9.3 U9.7 U10.2 U11.5 U12.7 Y3.2
NetC4_1: C4.1 U1.17 Y1.2
NetC6_1: C6.1 U1.16 Y1.1
NetC7_2: C7.2 R53.1 R54.1 U1.19
NetC8_2: C8.2 R60.2 U1.12
NetC9_2: C9.2 R48.1 U1.20
NetC10_1: C10.1 C11.2 CN3.1 U1.10
NetC10_2: C10.2 C12.2 CN3.2 U1.11
NetC21_2: C21.2 U3.9 Y2.2
NetC22_2: C22.2 U3.8 Y2.1
NetC23_1: C23.1 R34.2
NetC23_2: C23.2 R17.1 U3.6
NetC24_2: C24.2 R15.1 U3.1
NetC27_2: C27.2 C28.2 FB3.1 U4.9 U4.10
NetC30_2: C30.2 U3.12
NetC34_2: C34.2 C35.2 FB4.1 U5.22
NetC36_1: C36.1 C37.2 D1.2 R40.1 U5.7
NetC37_1: C37.1 C42.2 D2.2 R41.1 U5.6
NetC43_1: C43.1 U5.10
NetC43_2: C43.2 U5.9
NetC44_2: C44.2 R46.2 U5.15
NetC45_1: C45.1 R51.2
NetC45_2: C45.2 R12.1 U6.6
NetC46_2: C46.2 U5.27
NetC47_2: C47.2 U5.25
NetC48_2: C48.2 R50.1 U6.13
NetC49_2: C49.2 R49.1 U6.14
NetC50_2: C50.2 U6.12
NetC51_2: C51.2 U5.23
NetC52_2: C52.2 U5.11
NetC55_2: C55.2 C56.2 FB8.1 U7.3 U7.4
NetC58_2: C58.2 R56.1 U8.5
NetC59_2: C59.2 C60.2 FB11.2 U9.6
NetC63_2: C63.2 C64.2 FB13.2 R67.2 U10.1
NetC65_2: C65.2 C72.2 R66.1 R68.2 U10.4
NetC66_2: C66.2 C67.2 C68.2 FB12.1 U11.3 U11.4 U11.6
NetC69_2: C69.2 C70.2 FB14.1 U11.1
NetC74_2: C74.2 C75.2 L2.2 U12.8
NetD4_1: D4.1 TP13.1 U12.2
NetD5_2: D5.2 TP14.1 U12.3
NetFB9_2: FB9.2
NetFB10_2: FB10.2
NetL1_1: L1.1 U10.5
NetLED1_2: LED1.2 R18.2
NetLED2_2: LED2.2 R19.2
NetLED3_2: LED3.2 R80.2
NetQ1_1: Q1.1 R20.2
NetQ1_2: Q1.2 R18.1
NetQ2_1: Q2.1 R21.2
NetQ2_2: Q2.2 R19.1
NetQ3_1: Q3.1 R72.1
NetQ3_2: Q3.2 R69.1 U12.1
NetQ4_2: Q4.2 R71.1 U12.4
NetQ5_1: Q5.1 R74.1
NetQ5_2: Q5.2 R73.1 U12.6
NetQ6_2: Q6.2 R76.1 U12.5
NetQ6_3: Q6.3 R75.1 R79.2
NetR2_1: R2.1 U1.36
NetR2_2: R2.2 U1.37
NetR3_1: R3.1 R57.2 U1.13
NetR4_1: R4.1 R58.2 U1.18
NetR5_1: R5.1 U1.4
NetR6_1: R6.1 U1.3
NetR7_1: R7.1 U1.30
NetR8_1: R8.1 U1.1
NetR8_2: R8.2 R64.2 U9.4
NetR9_1: R9.1 R24.2 R32.1 R45.1 U1.9
NetR10_1: R10.1 R28.2 R33.1 R47.1 U1.6
NetR11_1: R11.1 U1.32
NetR12_2: R12.2 U1.27
NetR13_1: R13.1 U1.28
NetR14_1: R14.1 U1.22
NetR15_2: R15.2 U1.7
NetR16_1: R16.1 U1.25
NetR17_2: R17.2 U1.5
NetR22_1: R22.1 U2.6
NetR23_1: R23.1 R31.2 U2.1
NetR24_1: R24.1 R29.2 U2.2
NetR27_1: R27.1 U2.5
NetR28_1: R28.1 R30.2 U2.12
NetR32_2: R32.2 U3.23
NetR33_2: R33.2 U3.24
NetR36_2: R36.2 U4.3
NetR37_2: R37.2 U4.2
NetR38_2: R38.2 U4.13
NetR39_2: R39.2 Y3.1
NetR40_2: R40.2 TP11.1
NetR41_2: R41.2 TP12.1
NetR42_1: R42.1 U6.21
NetR42_2: R42.2 U5.18
NetR43_1: R43.1 U6.20
NetR43_2: R43.2 U5.17
NetR44_1: R44.1 U6.19
NetR44_2: R44.2 U5.16
NetR45_2: R45.2 U6.23
NetR46_1: R46.1 U6.18
NetR47_2: R47.2 U6.24
NetR48_2: R48.2 U6.4
NetR49_2: R49.2 U5.20
NetR50_2: R50.2 U5.21
NetR52_2: R52.2 U7.8
NetR54_2: R54.2 U7.5
NetR55_1: R55.1 U8.4
NetR57_1: R57.1 U8.6
NetR58_1: R58.1 U8.7
NetR59_1: R59.1 R60.1 U8.10
NetR59_2: R59.2 R67.1 U10.3
NetR62_1: R62.1 R63.2 U9.2
NetTP1_1: TP1.1 U1.15
NetTP2_1: TP2.1 U1.14
NetTP3_1: TP3.1 U1.24
NetTP4_1: TP4.1 U1.23
NetTP5_1: TP5.1 U1.21
nRESET: C5.1 CN1.4 R1.1 U1.2
PGND: C27.1 C28.1 R65.2 U4.4
PPG_INT_N: C20.2 R35.1 R38.1 U3.18
SENSOR_SCL: R26.1 R30.1 R37.1 U3.14
SENSOR_SDA: R25.1 R29.1 R36.1 U3.13
SWDCLK: CN1.2 U1.31
SWDIO: CN1.3 U1.35
UART2_RX: R79.1 U1.26
UART2_TX: Q4.3 R5.2 R70.1
USB_DM: FB9.1 J1.2
USB_DP: FB10.1 J1.3
USB_VBUS: D3.1 FB7.1 J1.1 LED3.1
V_USB: C53.2 C54.2 FB7.2 TP6.1 U7.1 U7.2
VBAT: C57.2 CN4.1 FB8.2 FB11.1 FB13.1 R55.2 R56.2 TP7.1
VBAT_-VE: C57.1 C58.1 CN4.2 R61.1 U8.2 U8.3 U8.11
VCC_1V8: C71.2 FB1.2 FB2.2 FB6.2 FB14.2 Q4.1 Q6.1 R53.2 R70.2 R75.2 TP10.1
VCC_1V8_BLE: C1.2 C2.2 C3.1 CN1.1 FB1.1 LED1.1 LED2.1 R1.2 R3.2 R4.2 R9.2 R10.2 U1.8
VCC_1V8_ECG: C31.2 C32.2 C33.2 C38.2 C39.2 C40.2 C41.2 FB4.2 FB6.1 R39.1 U5.13 U5.19 U6.11 U6.22 Y3.4
VCC_1V8_PPG: C13.2 C14.2 C15.2 C16.2 C17.2 C18.2 C19.2 C25.2 C26.2 FB2.1 R23.2 R25.2 R26.2 R35.2 U2.3 U2.7 U2.10 U3.11 U3.22 U4.11
VCC_2V: C65.1 FB12.2 L1.2 R66.2 TP9.1
VCC_3V3: C61.2 C62.2 C73.2 FB3.2 L2.1 R62.2 R69.2 R71.2 R73.2 R76.2 TP8.1 U9.1
pads on no net: J1.4 J1.6 J1.7 J1.8 J1.9 U1.29 U2.4 U2.11 U3.2 U3.3 U3.4 U3.5 U3.15 U3.16 U3.17 U3.20 U3.21 U4.1 U4.5 U4.6 U4.7 U4.8 U4.14 U6.1 U6.2 U6.3 U6.5 U6.8 U6.15 U6.16 U6.17 U7.7 U8.1 U8.8 U9.5 U11.2 U12.9

## Polygon pours and split planes (outlines as drawn)
PGND on Top Layer "gnd" (solid, pour order 2): 32.125,44.8 32.125,49.8 32.725,49.8 32.725,44.8
GND on Top Layer "gnd" (solid, pour order 0): 7.3,44.6 29.2,44.6 29.2,44 7.3,44

## Silkscreen, mask and mechanical layers (free items; w line width, h text height)
Mechanical 1:
  the board outline again, w0.2
Mechanical 3:
  circle w0.2: c3.5,46.5 r3.5
  circle w0.2: c46.5,46.5 r3.5
  circle w0.2: c46.5,3.5 r3.5
  circle w0.2: c3.5,3.5 r3.5
  rectangle: 7.3,44.6 29.3,50.1

## Dimensions
0,50 to 50,50 on Mechanical 1
0,0 to 0,50 on Mechanical 1